# Altium PCB PCB.PcbDoc
Units mm, origin at the board's own origin, x right, y up, seen from the top; angles counter-clockwise.
Board outline 85.6 x 54 mm, 4 copper layers (L1 (Signal), L2 (GND), L3 (GND), L4 (Signal)), stack 1.586 mm thick; 27 components, 19 nets, 123 pads, 24 vias.
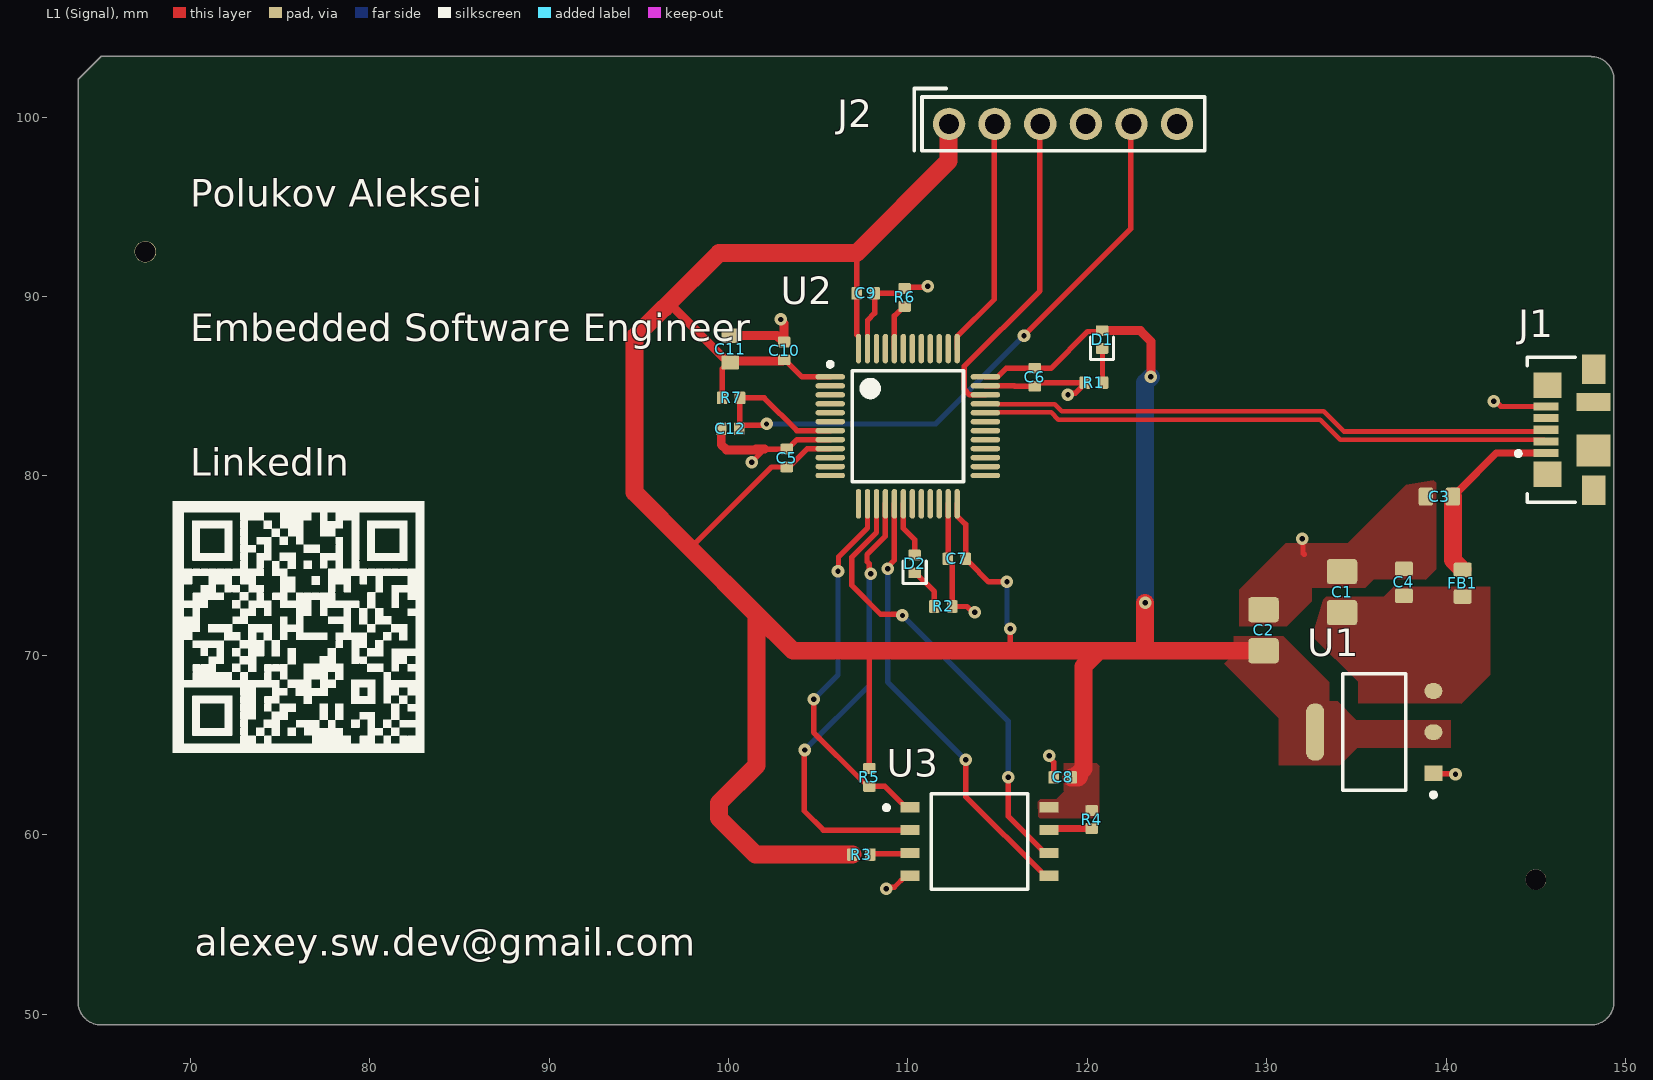
[diagram p0: L1 (Signal) view]
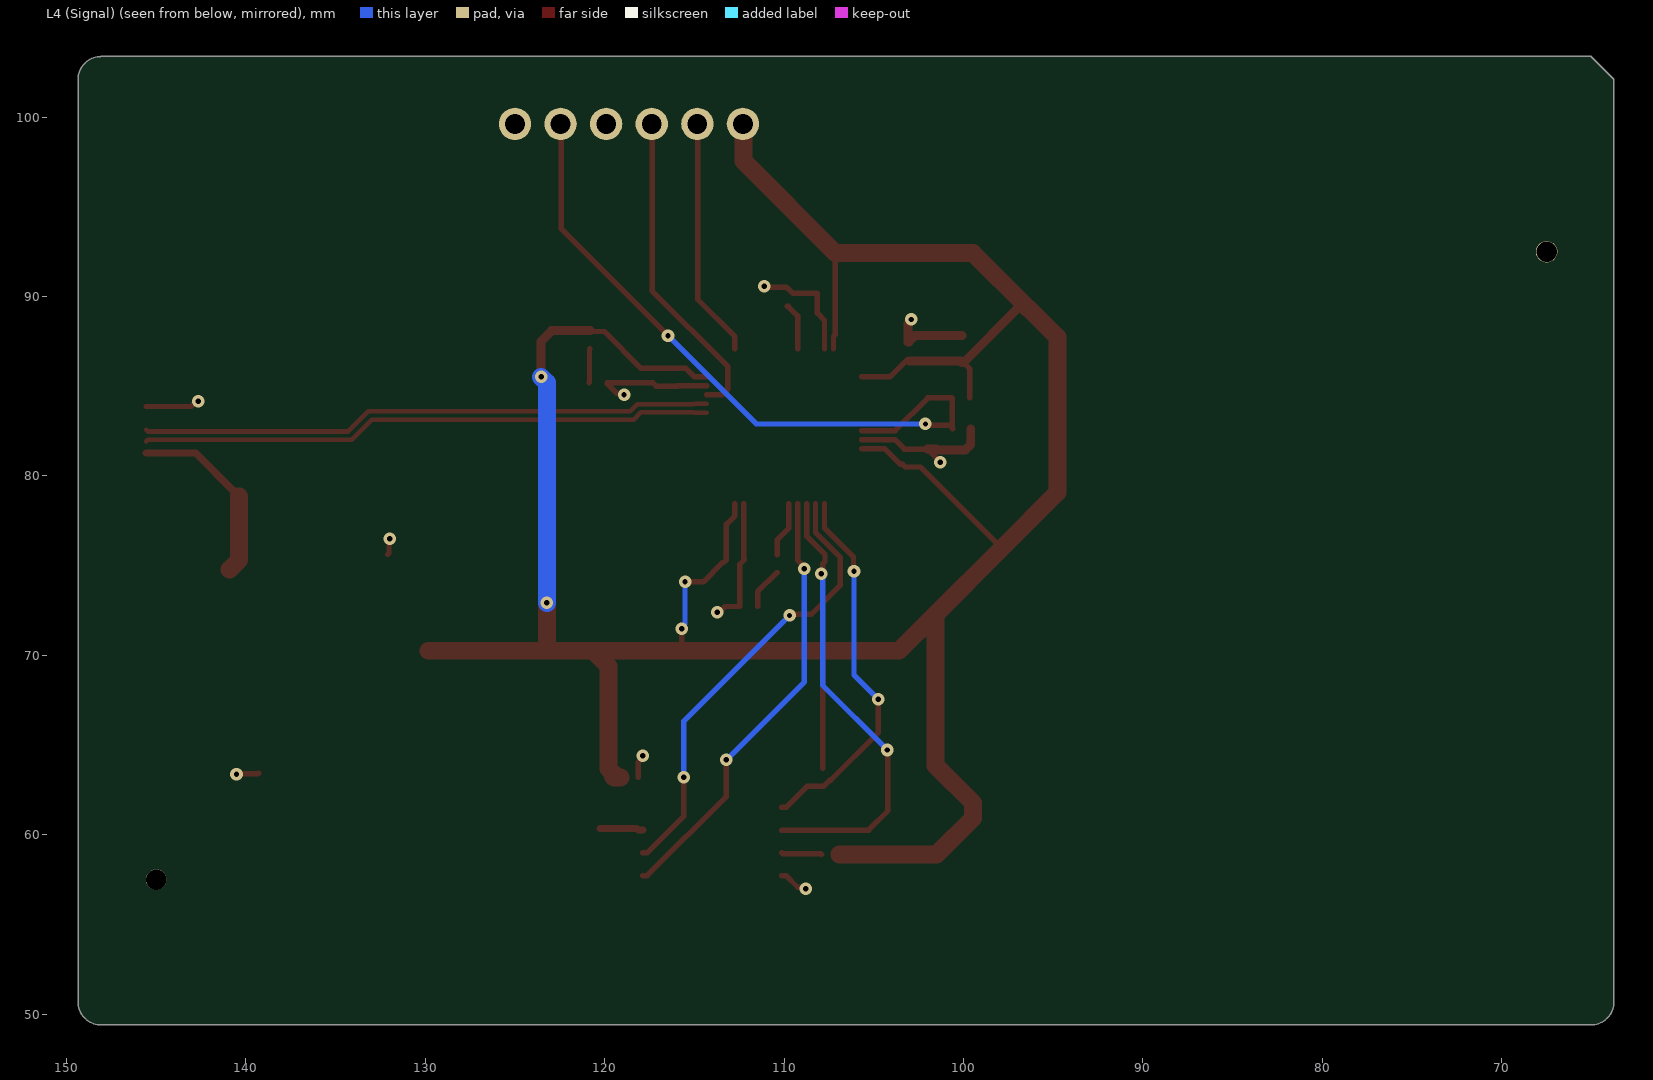
[diagram p1: L4 (Signal) view, seen from below]
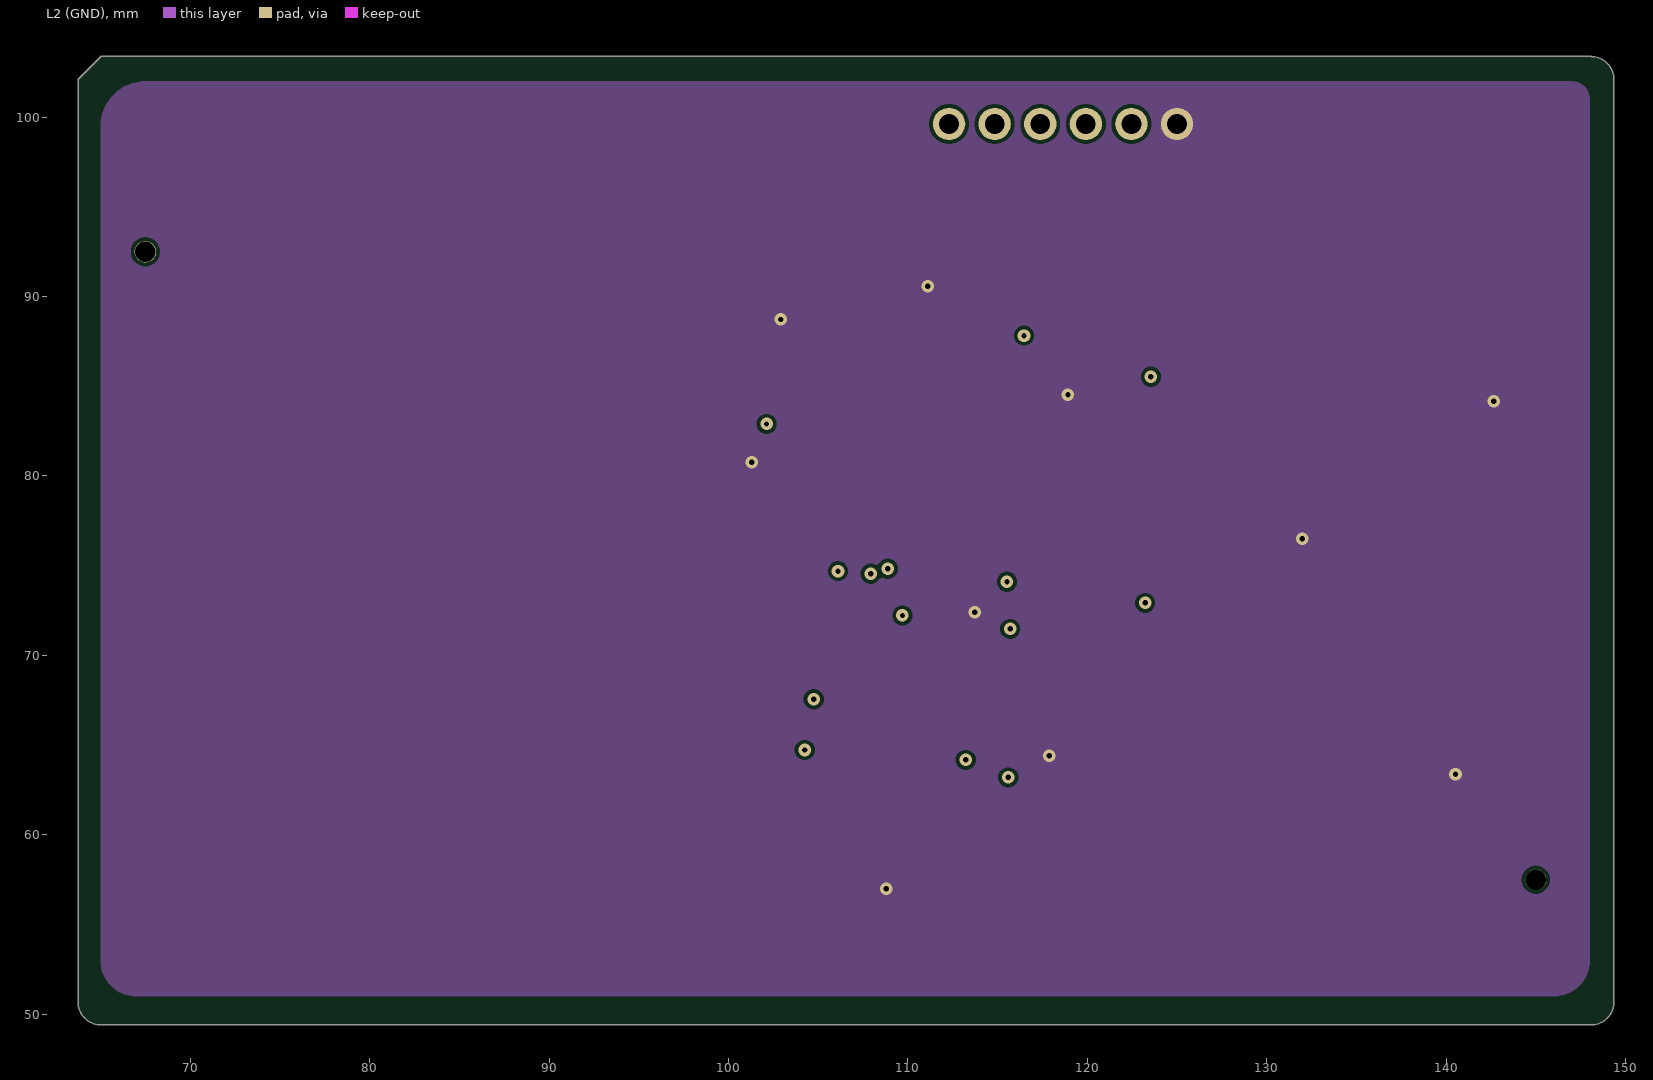
[diagram p2: L2 (GND)]
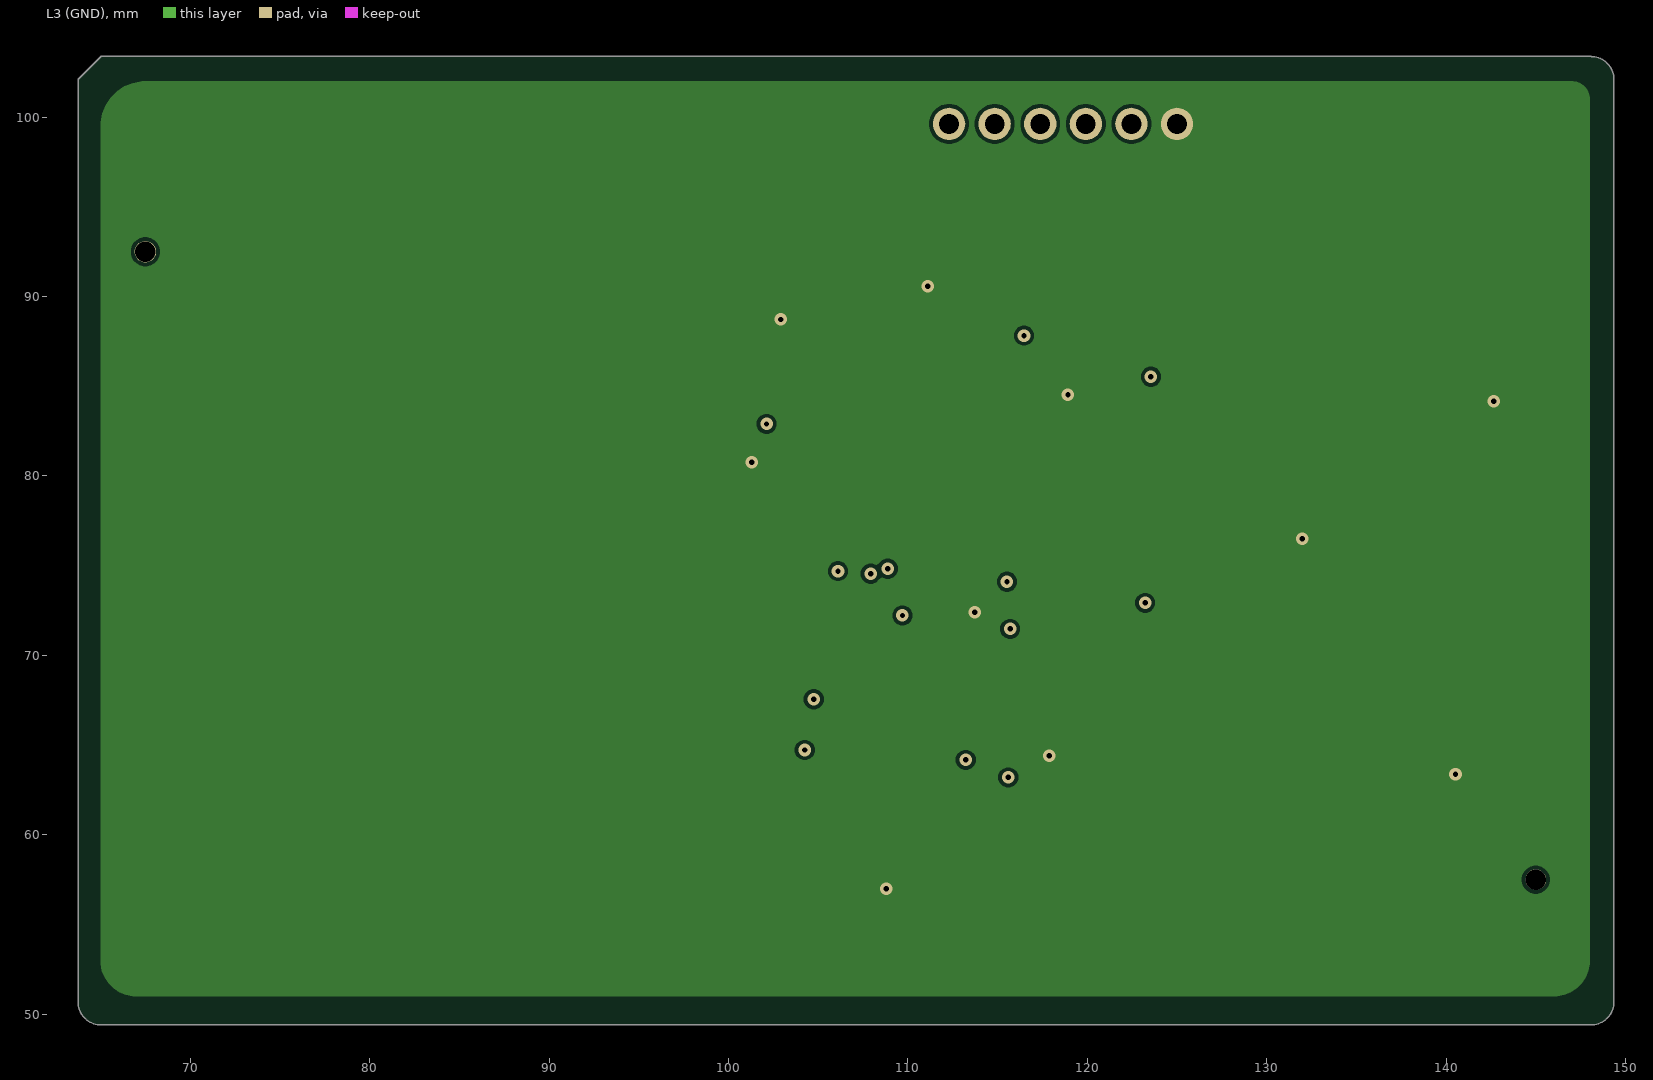
[diagram p3: L3 (GND)]
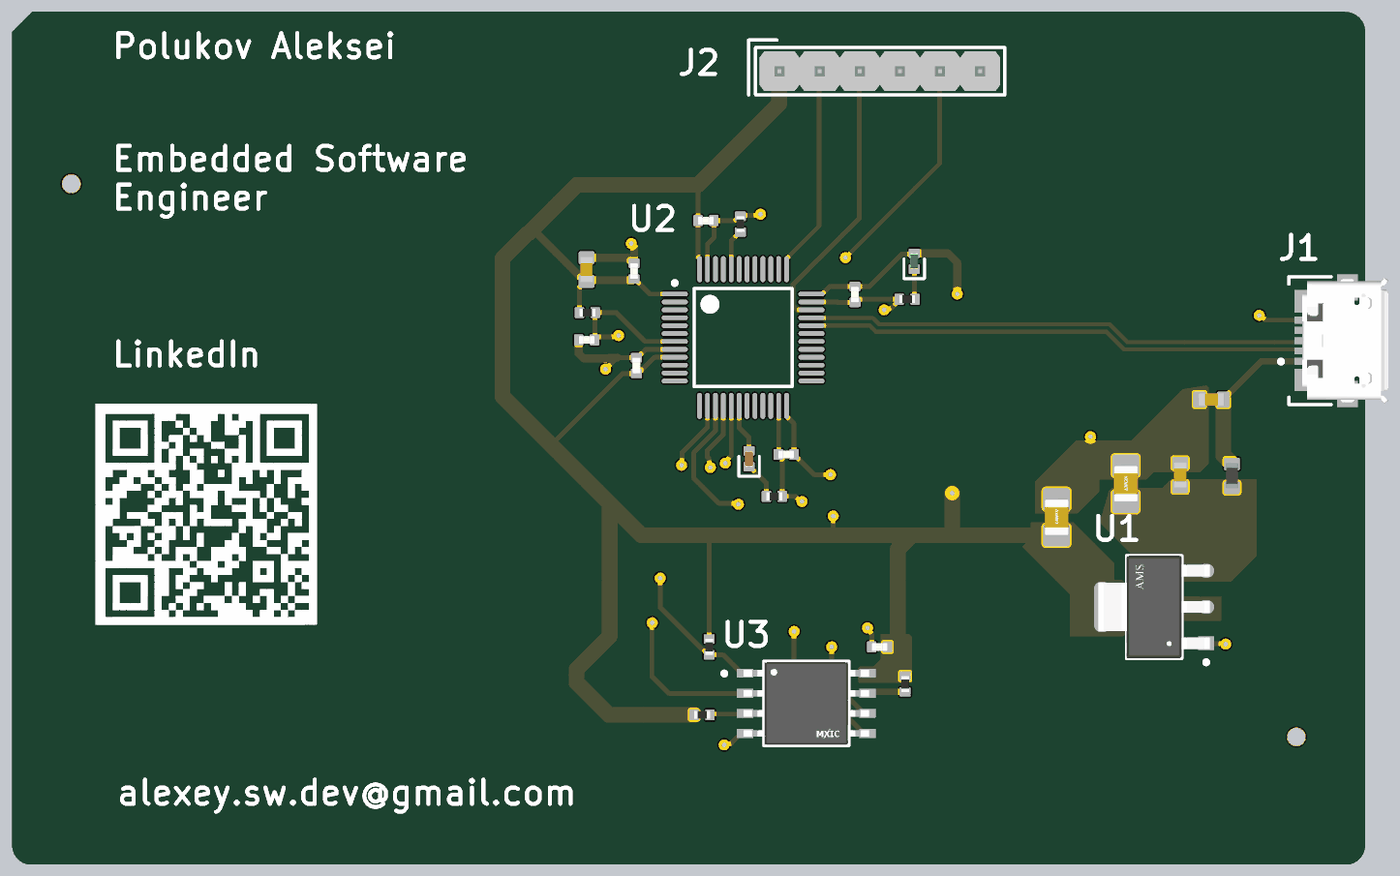
[diagram p4: 3D render of the assembled board from above, using the file's embedded part models]

## Layer stack, top to bottom
Top Solder: solder mask 0.0254, SM-001, Dk 4
L1 (Signal): signal copper 0.035
Dielectric 1: prepreg 0.2104, PP-017, Dk 4.6
L2 (GND): signal copper 0.0152
Dielectric 3: core 1.065, Core-039, Dk 4.6
L3 (GND): signal copper 0.0152
Dielectric 5: prepreg 0.2104, PP-017, Dk 4.6
L4 (Signal): signal copper 0.035
Bottom Solder: solder mask 0.0254, SM-001, Dk 4

## Board outline
63.754,50.673 ccw(c65.024,50.673) 65.024,49.403 148.082,49.403 ccw(c148.082,50.673) 149.352,50.673 149.352,102.108 ccw(c148.082,102.108) 148.082,103.378 148.059,103.401 65.036,103.401 63.754,102.119

## Design rules (kind name [scope] priority, off if disabled: settings)
Clearance [All] p1: gap=0.2 ignorepadtopadclearanceinfootprint=FALSE
DiffPairsRouting [All] p1: maxlimit=0.254 minlimit=0.203 mostfreqgap=0.254 toplayer_maxgap=0.203 toplayer_prefgap=0.203 toplayer_minwidth=0.26 toplayer_maxwidth=0.26 toplayer_prefwidth=0.26 bottomlayer_maxgap=0.203 bottomlayer_prefgap=0.203 bottomlayer_minwidth=0.26 bottomlayer_maxwidth=0.26 bottomlayer_prefwidth=0.26 impedanceprofiledriven=TRUE impedanceprofileid={10D1A55F-8081-4A09-ADF5-BF3E190647D9} impedanceprofilevalue=90.000000 maxuncoupledlength=12.7
PolygonConnect [All] p1: connectstyle=Direct reliefconductorwidth=0.254 reliefentries=4 polygonreliefangle="90 Angle" airgapwidth=0.254
RoutingVias [All] p1: holewidth=0.3 width=0.7 viastyle="Through Hole" minholewidth=0.25 minwidth=0.55 maxholewidth=0.4 maxwidth=0.9
SolderMaskExpansion [All] p1: expansion=0.102 istentingtop=FALSE
SupplyNets "Schematic Supply Nets_5" [InNet('VBUS')] p1: voltage=0.000
SupplyNets "Schematic Supply Nets_4" [InNet('+3V3')] p2: voltage=0.000
SupplyNets "Schematic Supply Nets_2" [InNet('+5V')] p3: voltage=0.000
SupplyNets "Schematic Supply Nets" [InNet('GND')] p4: voltage=0.000
UnRoutedNet [All] p1: checkbadconnections=TRUE
Width [All] p1: maxlimit=1 minlimit=0.2 preferedwidth=0.3 midlayer1_minwidth=0.254 midlayer1_maxwidth=0.254 midlayer1_prefwidth=0.254 midlayer2_minwidth=0.254 midlayer2_maxwidth=0.254 midlayer2_prefwidth=0.254 minimp=50.000000 maximp=50.000000 favimp=50.000000
28 further rules are at their usual default settings.

## Classes and differential pairs
component class AltiumSTM32_Schematic: C1 C3 C4 C5 C6 C7 C8 C9 C10 C11 C12 D1 D2 FB1 J1 J2 R1 R2 R3 R4 R5 R6 R7 U2 U3
differential pair USB_D: +USB_D_P -USB_D_N

## Components (designator, comment, footprint, x,y, rotation, side; value= is the part's Value field where it differs from the comment)
C1 "22u" CAP_0805 134.2,73.525 r270 top
C2 "22u" CAP_0805 129.825,71.4 r270 top
C3 "2.2u" CAP_0603 139.625,78.85 r0 top
C4 "2.2u" CAP_0603 137.65,74.075 r270 top
C5 "100n" CAP_0402 103.25,81 r270 top
C6 "100n" CAP_0402 117.075,85.5 r90 top
C7 "100n" CAP_0402 112.725,75.375 r0 top
C8 "100n" CAP_0402 118.632,63.196 r0 top
C9 "100n" CAP_0402 107.65,90.175 r180 top
C10 "100n" CAP_0402 103.1,86.975 r270 top
C11 "2.2u" CAP_0603 100.1,87.075 r90 top
C12 "100n" CAP_0402 100.1,82.625 r180 top
D1 "GREEN" LED_0402_GREEN 120.825,87.6 r270 top
D2 "RED" LED_0402_RED 110.375,75.1 r270 top
FB1 "120R" FB_0603 140.925,74.025 r270 top
J1 "473460001" FP-473460001-MFG 147.875,82.575 r90 top
J2 "G800W302018EU" G800W302018EU 118.65,99.625 r90 top
R1 "1k" RES_0402 120.375,85.2 r0 top
R2 "1k" RES_0402 111.975,72.725 r180 top
R3 "10k" RES_0402 107.404,58.899 r180 top
R4 "10k" RES_0402 120.25,60.85 r90 top
R5 "10k" RES_0402 107.854,63.197 r90 top
R6 "10K" RES_0402 109.825,89.95 r270 top
R7 "10K" RES_0402 100.15,84.35 r180 top
U1 "AMS1117-3.3" FP-AMS1117-IPC_C 136,65.725 r180 top
U2 "STM32F072CBT6TR" STM-LQFP48_M 110,82.775 r0 top
U3 "MX25L12833FM2I-10G" FP-MX25L12833FM2I-10G-MFG 114,59.625 r0 top

## Footprints (in the part's own frame and the unit in brackets; to place one, negate y for a bottom-side part, rotate by r counter-clockwise, add the part's x,y. Pads: shape width x height; smd on the part's side, far side on the other; paste and mask are expansions set on the pad)
CAP_0402 [mm]
  rrect25% 0.6x0.7 smd: 1(-0.5,0) 2(0.5,0)
  body extent -0.5,-0.26 0.5,0.26, height 0.37
CAP_0603 [mm]
  rrect25% 0.8x1 smd: 1(-0.75,0) 2(0.75,0)
  body extent -0.8,-0.4 0.8,0.4, height 0.51
CAP_0805 [mm]
  rrect25% 1.4x1.7 smd: 1(-1.143,0) 2(1.143,0)
  body extent -1.15,-0.76 1.15,0.79, height 1.01
FB_0603 [mm]
  rrect25% 0.8x1 smd: 1(-0.75,0) 2(0.75,0)
  body extent -0.8,-0.4 0.8,0.4, height 0.81
FP-473460001-MFG [mm]
  rect 0.45x1.38 smd paste+0 mask+0: 1(-1.3,2.31) 2(-0.65,2.31) 3(0,2.31) 4(0.65,2.31) 5(1.3,2.31)
  rect 1.425x1.55 smd paste+0 mask+0: 6(-2.488,2.225) 7(2.488,2.225)
  rect 1.65x1.3 smd paste+0 mask+0: 8(-3.375,-0.35) 11(3.375,-0.35)
  rect 1.8x1.9 smd paste+0 mask+0: 9(-1.15,-0.35)
  rect 1x1.9 smd paste+0 mask+0: 10(1.55,-0.35)
  silkscreen extent -4.05,0.67 4.05,3.97, body extent -4.3,-2.48 4.3,3.45, height 0.25
FP-AMS1117-IPC_C [mm]
  rect 1.004x0.872 smd paste+0 mask+0: 1(-3.295,2.29)
  rrect100% 1.004x0.872 smd paste+0 mask+0: 2(-3.295,0) 3(-3.295,-2.29)
  rrect87% 1.004x3.182 smd paste+0 mask+0: 4(3.295,0)
  silkscreen extent -3.42,-3.25 1.75,3.62, body extent -3.9,-3.35 3.9,3.35, height 0.25
FP-MX25L12833FM2I-10G-MFG [mm]
  rect 1.05x0.57 smd paste+0 mask+0: 1(-3.875,1.905) 2(-3.875,0.635) 3(-3.875,-0.635) 4(-3.875,-1.905) 5(3.875,-1.905) 6(3.875,-0.635) 7(3.875,0.635) 8(3.875,1.905)
  silkscreen extent -5.31,-2.67 2.69,2.67, body extent -4.5,-2.77 4.5,2.77, height 0.25
G800W302018EU [mm]
  round 1.8 hole 1.1 mask+0.07: 1(0,6.35) 2(0,3.81) 3(0,1.27) 4(0,-1.27) 5(0,-3.81) 6(0,-6.35)
  silkscreen extent -1.5,-7.9 1.97,8.3, body extent -1.25,-7.62 1.25,7.62, height 8.61
LED_0402_GREEN [mm]
  rrect25% 0.6x0.7 smd: A(-0.5,0) K(0.5,0)
  silkscreen extent -0.15,-0.65 1.1,0.65, body extent -0.51,-0.25 0.51,0.25, height 0.45
LED_0402_RED [mm]
  rrect25% 0.6x0.7 smd: A(-0.5,0) K(0.5,0)
  silkscreen extent -0.15,-0.65 1.1,0.65, body extent -0.51,-0.25 0.51,0.25, height 0.45
RES_0402 [mm]
  rrect25% 0.6x0.7 smd: 1(-0.5,0) 2(0.5,0)
  body extent -0.5,-0.25 0.5,0.25, height 0.3
STM-LQFP48_M [mm] "QFP, 48-Leads, Body 7x7mm, Pitch 0.5mm, IPC Low Density"
  oval 1.65x0.3 smd: 1(-4.325,2.75) 2(-4.325,2.25) 3(-4.325,1.75) 4(-4.325,1.25) 5(-4.325,0.75) 6(-4.325,0.25) 7(-4.325,-0.25) 8(-4.325,-0.75) 9(-4.325,-1.25) 10(-4.325,-1.75) 11(-4.325,-2.25) 12(-4.325,-2.75) 25(4.325,-2.75) 26(4.325,-2.25) 27(4.325,-1.75) 28(4.325,-1.25) 29(4.325,-0.75) 30(4.325,-0.25) 31(4.325,0.25) 32(4.325,0.75) 33(4.325,1.25) 34(4.325,1.75) 35(4.325,2.25) 36(4.325,2.75)
  oval 0.3x1.65 smd: 13(-2.75,-4.325) 14(-2.25,-4.325) 15(-1.75,-4.325) 16(-1.25,-4.325) 17(-0.75,-4.325) 18(-0.25,-4.325) 19(0.25,-4.325) 20(0.75,-4.325) 21(1.25,-4.325) 22(1.75,-4.325) 23(2.25,-4.325) 24(2.75,-4.325) 37(2.75,4.325) 38(2.25,4.325) 39(1.75,4.325) 40(1.25,4.325) 41(0.75,4.325) 42(0.25,4.325) 43(-0.25,4.325) 44(-0.75,4.325) 45(-1.25,4.325) 46(-1.75,4.325) 47(-2.25,4.325) 48(-2.75,4.325)
  silkscreen extent -4.45,-3.1 3.1,3.57, body extent -3.5,-3.5 3.5,3.5, height 1.6

## Part data
C1 C2: library part CAP_0805, "Capacitor SMD 0805"
C3 C4 C11: library part CAP_0603, "Capacitor SMD 0603"
C5 C6 C7 C8 C9 C10 C12: library part CAP_0402, "Capacitor SMD 0402"
D1: library part LED_0402_GREEN, "LED 0402 GREEN SMD"
D2: library part LED_0402_RED, "LED 0402 RED SMD"
FB1: library part FB_0603, "Ferrite Bead SMD 0603"
J1: library part CMP-2000-05246-2, "CONN RCPT USB2.0 MICRO B SMD R/A", Current Rating=1.8A, Manufacturer=Molex, Package=0, Temperature="-30°C to +85°C", Temperature Range High=+85°C, Temperature Range Low=-30°C, Voltage Rating=30V, Automotive=No, Category=Conn, ComponentLink2Description=Datasheet, ComponentLink2URL=https://www.molex.com/webdocs/datasheets/pdf/en-us/0473460001_IO_CONNECTORS.pdf, Conn Orientation="Right Angle", Contact Material=Gold,Nickel, Device Class L1=Connectors, Device Class L2="USB Connectors", Device Class L3=unset, Digikey Description="CONN RCPT USB2.0 MICRO B SMD R/A", Footprint Url=https://www.molex.com/pdm_docs/sd/473460001_sd.pdf, Height=2.945mm, Is Female=yes, Lead Free=Yes, Manufacturer Part Number=473460001, Number Of Contacts=5, Octopart=https://octopart.com/47346-0001-molex-7164928, Pitch=0.65mm, RoHS=TRUE, Shielding=true, Usb Standard="USB 2.0"
J2: "Pin Header 6 Position 2.54mm Pitch", Manufacturer=Amphenol, Manufacturer Part Number=G800W302018EU
R1 R2 R3 R4 R5 R6 R7: library part RES_0402, "Resistor SMD 0402"
U1: library part CMP-209535-000001-1, "LDO Voltage Regulators 1A, 3.3V", Dropout Voltage=1.1V, Manufacturer="Advanced Monolithic Systems", Max Junction Temp=+125°C, Max Power Dissipation=1.2W, Max Supply Voltage=15V, Nominal Supply Current=5mA, Output Current=1A, Output Voltage=3.3V, Package=AMS1117, Temperature="-40°C to +125°C", Temperature Range Low=-40°C, Automotive=No, Category=IC, ComponentLink2Description=Datasheet, ComponentLink2URL=http://www.advanced-monolithic.com/pdf/ds1117.pdf, Device Class L1="Integrated Circuits (ICs)", Device Class L2="Power Management ICs", Device Class L3="Voltage Regulators - Linear", Height=1.8mm, Ipc Land Pattern Name=SOT229P700X180-4, Lead Free=Yes, Manufacturer Part Number=AMS1117-3.3, Number Of Outputs=1, Octopart=https://octopart.com/ams1117-3.3-advanced+monolithic+systems-25899300, Output Type=Fixed, RoHS=TRUE, Standoff Height=0.64mm, Temperature Range High=+125°C
U2: library part CMP-0304-00171-1, "ARM Cortex-M0 32-bit MCU, 128 KB Flash, 16 KB Internal RAM, 37 I/Os, 48-Pin LQFP, -40 to 85 degC, Tape and Reel", I/Os (High Current)=37, Operating Frequency(F) (Processor speed) (MHz)=48, Package Description="48-Pin Low Profile Quad Flat Package, Body 7 x 7 mm, Pitch 0.5 mm", Package Reference=LQFP48, Supply Voltage(Vcc) min (V)=2, ComponentLink1Description="Manufacturer URL", ComponentLink1URL=http://www.st.com/, ComponentLink2Description=Datasheet, ComponentLink2URL=http://www.st.com/st-web-ui/static/active/en/resource/technical/document/datasheet/DM00090510.pdf, Core="ARM Cortex-M0", D/A Converter=1, DatasheetVersion="Rev. 5", FLASH Size (Prog) (kB)=128, Internal RAM Size (kB)=16, Mounting Technology="Surface Mount", Packing="Tape and Reel"
U3: library part CMP-105207-000006-1, "IC FLASH 128MBIT SPI/QUAD 8SOP", RoHS Compliant=Yes

## Free pads (board coordinates)
  round 1.2 hole 1.152 mask+0.102: TH1(67.5,92.5)
  round 1.152 hole 1.152 mask+0.102: TH2(145,57.5)

## Via types
v1: diameter 0.7, hole 0.3, L1 (Signal) to L4 (Signal), 24 vias

## Nets (pads, with @x,y where several pads share a name; then routed paths per layer and width w, separated by ;. In a path a pad name is that pad's centre, name@x,y a point inside that pad or via, vN(x,y) a via of type N, cw(c..) or ccw(c..) an arc to the next point about the centre after c; other vN are vias at no path point)
+3V3: C2.2 C5.2 C6.2 C7.2 C8.2 C9.2 C10.2 C11.1 D1.A J2.1 R3.2 R4.2 R5.2 R7.2 U1.2 U1.4 U2.1 U2.9 U2.24 U2.36 U2.48 U3.8 | length 172.2
  L1 (Signal) w0.3: 97.875,75.975 102.4,80.5 C5.2 103.4,80.65 103.525,80.65 104.4,81.525 U2.9 ; R7.2 99.65,85.975 C11.1@100,86.325 ; C11.1 C11.1@100.175,86.4 ; C10.2@103.025,86.4 C10.2 103.15,86.475 104.1,85.525 U2.1 ; 107.15,92.435 C9.2 107.15,87.875 107.25,87.775 U2.48 ; 107.675,70.257 107.854,70.078 R5.2 ; U2.24 112.75,77.775 113.225,77.3 C7.2 113.225,75.325 113.375,75.175 113.425,75.175 114.5,74.1 v1(115.525,74.1) ; U2.36 115,85.525 115.475,86 C6.2 117.975,86 120.025,88.05 120.775,88.05 D1.A ; 115.7,70.257 v1(115.7,71.475) ; 123.125,70.257 123.225,70.357
  L1 (Signal) w0.5: 96.95,89.375 100,86.325 C11.1 ; C11.1@100.175,86.4 C10.2@103.025,86.4 ; D1.A 122.957,88.1 123.55,87.507 v1(123.55,85.525)
  L1 (Signal) w1: R3.2 101.501,58.899 99.464,60.936 99.464,61.764 101.562,63.862 101.562,72.288 ; J2.1@112.275,99.625 112.275,97.56 107.15,92.435 99.485,92.435 96.425,89.375 96.4,89.375 94.775,87.75 94.775,79.075 97.875,75.975 101.562,72.288 ; C8.2 119.496,63.196 119.55,63.25 119.45,63.35 119.786,63.686 119.786,69.393 120.65,70.257 ; 123.225,70.357 v1(123.225,72.925) ; C2.2 123.125,70.257 120.65,70.257 ; 101.562,72.288 103.593,70.257 107.675,70.257 115.7,70.257 120.65,70.257
  L4 (Signal) w0.3: v1(115.525,74.1) 115.525,71.758 115.7,71.583 v1(115.7,71.475)
  L4 (Signal) w1: v1(123.225,72.925) 123.225,85.2 v1(123.55,85.525)
+5V: C1.2 C4.2 FB1.2 U1.3
GND: C1.1 C2.1 C3.1 C4.1 C5.1 C6.1 C7.1 C8.1 C9.1 C10.1 C11.2 C12.2 J1.5 J2.6 R1.1 R2.1 R6.1 U1.1 U2.8 U2.23 U2.35 U2.47 U3.4 | length 41.4
  L1 (Signal) w0.3: v1(101.3,80.775) 102.025,81.5 C5.1 103.3,81.5 103.825,82.025 U2.8 ; U2.47 107.75,88.675 108.15,89.075 C9.1 109.5,90.175 109.775,90.45 R6.1 109.887,90.512 111.037,90.512 v1(111.1,90.575) ; v1(108.8,57) 108.877,57.077 109.242,57.077 109.885,57.72 U3.4 ; U2.23 112.25,75.4 C7.1 112.225,75.325 112.475,75.075 R2.1 113.292,72.725 113.617,72.4 v1(113.725,72.4) ; U2.35 115.925,85.025 115.95,85 C6.1 117.125,85 117.325,85.2 R1.1 119.875,85.15 119.327,84.602 119.002,84.602 v1(118.925,84.525) ; v1(117.875,64.4) 117.875,64.292 118.132,64.035 C8.1 ; v1(131.975,76.5) 132.025,76.45 132.025,75.7 132.1,75.625 ; U1.1 139.325,63.405 140.495,63.405 v1(140.525,63.375) ; v1(142.65,84.175) 142.758,84.175 143.058,83.875 J1.5
  L1 (Signal) w0.5: C12.2 99.6,81.75 99.893,81.457 101.5,81.457 101.543,81.5 102.025,81.5 ; C11.2 102.7,87.825 103.05,87.475 C10.1 103.1,88.496 102.925,88.671 v1(102.925,88.725)
LED_PWR_K: D1.K R1.2 | length 1.9
  L1 (Signal) w0.3: D1.K 120.85,87.075 120.85,85.225 R1.2
MCU_BOOT0: R6.2 U2.44 | length 2.6
  L1 (Signal) w0.3: U2.44 109.25,88.925 109.775,89.45 R6.2
MCU_LED_A: D2.A U2.18 | length 3.1
  L1 (Signal) w0.3: U2.18 109.75,77.075 110.375,76.45 D2.A
MCU_LED_K: D2.K R2.2 | length 2.4
  L1 (Signal) w0.3: D2.K 110.425,74.6 111.475,73.55 R2.2
MCU_NRST: C12.1 J2.5 R7.1 U2.7 | length 39.8
  L1 (Signal) w0.3: C12.1 100.625,82.65 C12.1@100.625,82.698 ; v1(102.125,82.9) 102.048,82.823 100.75,82.823 C12.1@100.625,82.698 ; U2.7 103.812,82.525 101.987,84.35 R7.1 100.625,84.325 C12.1@100.625,82.698 ; v1(116.475,87.825) 122.435,93.785 J2.5@122.435,99.625
  L4 (Signal) w0.3: v1(102.125,82.9) 111.55,82.9 v1(116.475,87.825)
MEM_NRST: R4.1 U3.7 | length 2.4
  L1 (Signal) w0.4: U3.7 118.115,60.26 118.205,60.35 R4.1
MEM_NWP: R3.1 U3.3 | length 2.3
  L1 (Signal) w0.3: R3.1 107.95,58.945 110.08,58.945 U3.3
SPI_CLK: U2.15 U3.6 | length 25.4
  L1 (Signal) w0.3: U2.15 108.25,76.857 106.875,75.482 106.875,73.9 108.49,72.285 109.64,72.285 v1(109.7,72.225) ; v1(115.6,63.2) 115.6,61.025 117.635,58.99 U3.6
  L4 (Signal) w0.3: v1(109.7,72.225) 115.6,66.325 v1(115.6,63.2)
SPI_CS: R5.1 U2.14 U3.1 | length 21.1
  L1 (Signal) w0.3: v1(104.75,67.55) 104.75,65.701 107.403,63.047 107.454,63.047 107.804,62.697 R5.1 108.718,62.697 109.885,61.53 U3.1 ; v1(106.108,74.697) 106.136,74.724 106.136,75.497 107.75,77.111 U2.14
  L4 (Signal) w0.3: v1(104.75,67.55) 106.108,68.908 v1(106.108,74.697)
SPI_MISO: U2.16 U3.2 | length 25.5
  L1 (Signal) w0.3: v1(104.25,64.725) 104.225,64.7 104.225,61.325 105.29,60.26 U3.2 ; v1(107.925,74.55) 107.848,74.627 107.848,75.102 107.725,75.225 107.725,75.625 108.75,76.65 U2.16
  L4 (Signal) w0.3: v1(104.25,64.725) 107.85,68.325 107.85,74.475 v1(107.925,74.55)
SPI_MOSI: U2.17 U3.5 | length 24.8
  L1 (Signal) w0.3: v1(108.875,74.825) 108.875,74.933 109.25,75.308 U2.17 ; v1(113.225,64.175) 113.225,62.13 117.635,57.72 U3.5
  L4 (Signal) w0.3: v1(108.875,74.825) 108.875,68.525 v1(113.225,64.175)
SW_CLK: J2.2 U2.37 | length 13.4
  L1 (Signal) w0.3: U2.37 112.75,87.775 114.815,89.84 J2.2@114.815,99.625
SWDIO: J2.3 U2.34 | length 17.8
  L1 (Signal) w0.3: U2.34 113.443,84.525 113.15,84.818 113.15,86.118 117.355,90.323 J2.3@117.355,99.625
USB_D_N: J1.2 U2.32 | length 31.9
  L1 (Signal) w0.26: U2.32 114.333,83.533 115.036,83.533 115.046,83.543 117.99,83.543 118.39,83.143 132.985,83.143 134.11,82.018 145.472,82.018 J1.2
USB_D_P: J1.3 U2.33 | length 31.9
  L1 (Signal) w0.26: U2.33 114.333,84.017 115.036,84.017 115.046,84.007 118.182,84.007 118.582,83.607 133.177,83.607 134.302,82.482 145.472,82.482 J1.3
VBUS: C3.2 FB1.1 J1.1 | length 10.6
  L1 (Signal) w0.4: C3.2 140.375,78.95 140.575,79.15 140.675,79.15 142.8,81.275 J1.1
  L1 (Signal) w1: C3.2 140.375,75.325 FB1.1
pads on no net: J1.4 J1.6 J1.7 J1.8 J1.9 J1.10 J1.11 J2.4 U2.2 U2.3 U2.4 U2.5 U2.6 U2.10 U2.11 U2.12 U2.13 U2.19 U2.20 U2.21 U2.22 U2.25 U2.26 U2.27 U2.28 U2.29 U2.30 U2.31 U2.38 U2.39 U2.40 U2.41 U2.42 U2.43 U2.45 U2.46

## Polygon pours and split planes (outlines as drawn)
+3V3 on L1 (Signal) "+3V3_L01_P012" (solid, pour order 12): 117.275,61 117.35,60.925 120.675,60.925 120.675,63.8 120.7,63.825 120.525,64 118.7,64 118.7,62.45 118.725,62.425 118.275,61.975 117.25,61.975
+3V3 on L1 (Signal) "+3V3_L01_P015" (solid, pour order 15): 140.25,66.375 140.25,64.85 135.05,64.85 134.075,63.875 130.675,63.875 130.675,66.5 127.65,69.525 128.175,70.05 128.175,71.075 130.925,71.075 133.5,68.5 133.5,67.45 133.95,67.45 134.975,66.425
GND on L1 (Signal) "GND_L01_P014" (solid, pour order 14): 139.45,79.775 139.45,74.8 138.875,74.225 138.85,74.25 135.975,74.25 135.5,73.775 132.525,73.775 132.525,73.025 131.125,71.625 128.475,71.625 128.475,73.65 131.075,76.25 134.525,76.25 137.775,79.5
+5V on L1 (Signal) "+5V_L01_P010" (solid, pour order 10): 133.15,73.1 133.325,73.275 136.525,73.275 137.1,73.85 137.125,73.825 142.475,73.825 142.475,68.925 140.85,67.3 140.825,67.325 135.1,67.325 135.1,68.525 132.55,71.075
GND on L3 (GND) "GND_L03_P002" (solid, pour order 2): 65,99.46 cw(c67.54,99.46) 67.54,102 147,102 cw(c147,101) 148,101 148,53 cw(c146,53) 146,51 67,51 cw(c67,53) 65,53
GND on L2 (GND) "GND_L02_P000" (solid, pour order 0): 65,99.46 cw(c67.54,99.46) 67.54,102 147,102 cw(c147,101) 148,101 148,53 cw(c146,53) 146,51 67,51 cw(c67,53) 65,53

## Silkscreen, mask and mechanical layers (free items; w line width, h text height)
Top Overlay:
  drawing of 38 lines, arcs and shapes, not listed
  text "Polukov Aleksei" at 70,95 h1.52
  text "Embedded Software Engineer" at 70,87.5 h1.52
  text "LinkedIn" at 70,80 h1.52
  text "alexey.sw.dev@gmail.com" at 70.254,53.262 h1.52

## Text inside footprints (layer, text, board x,y; h text height)
D1: Mechanical 13 "+" at 121.333,89.483 h0.5 r270
D2: Mechanical 13 "+" at 110.883,76.983 h0.5 r270